# Altium PCB PCB_EN1093.PcbDoc
Units mm, origin at the board's own origin, x right, y up, seen from the top; angles counter-clockwise.
Board outline 80.26 x 60.25 mm, 2 copper layers (Top Layer, Bottom Layer); 26 components, 25 nets, 112 pads, 2 vias.
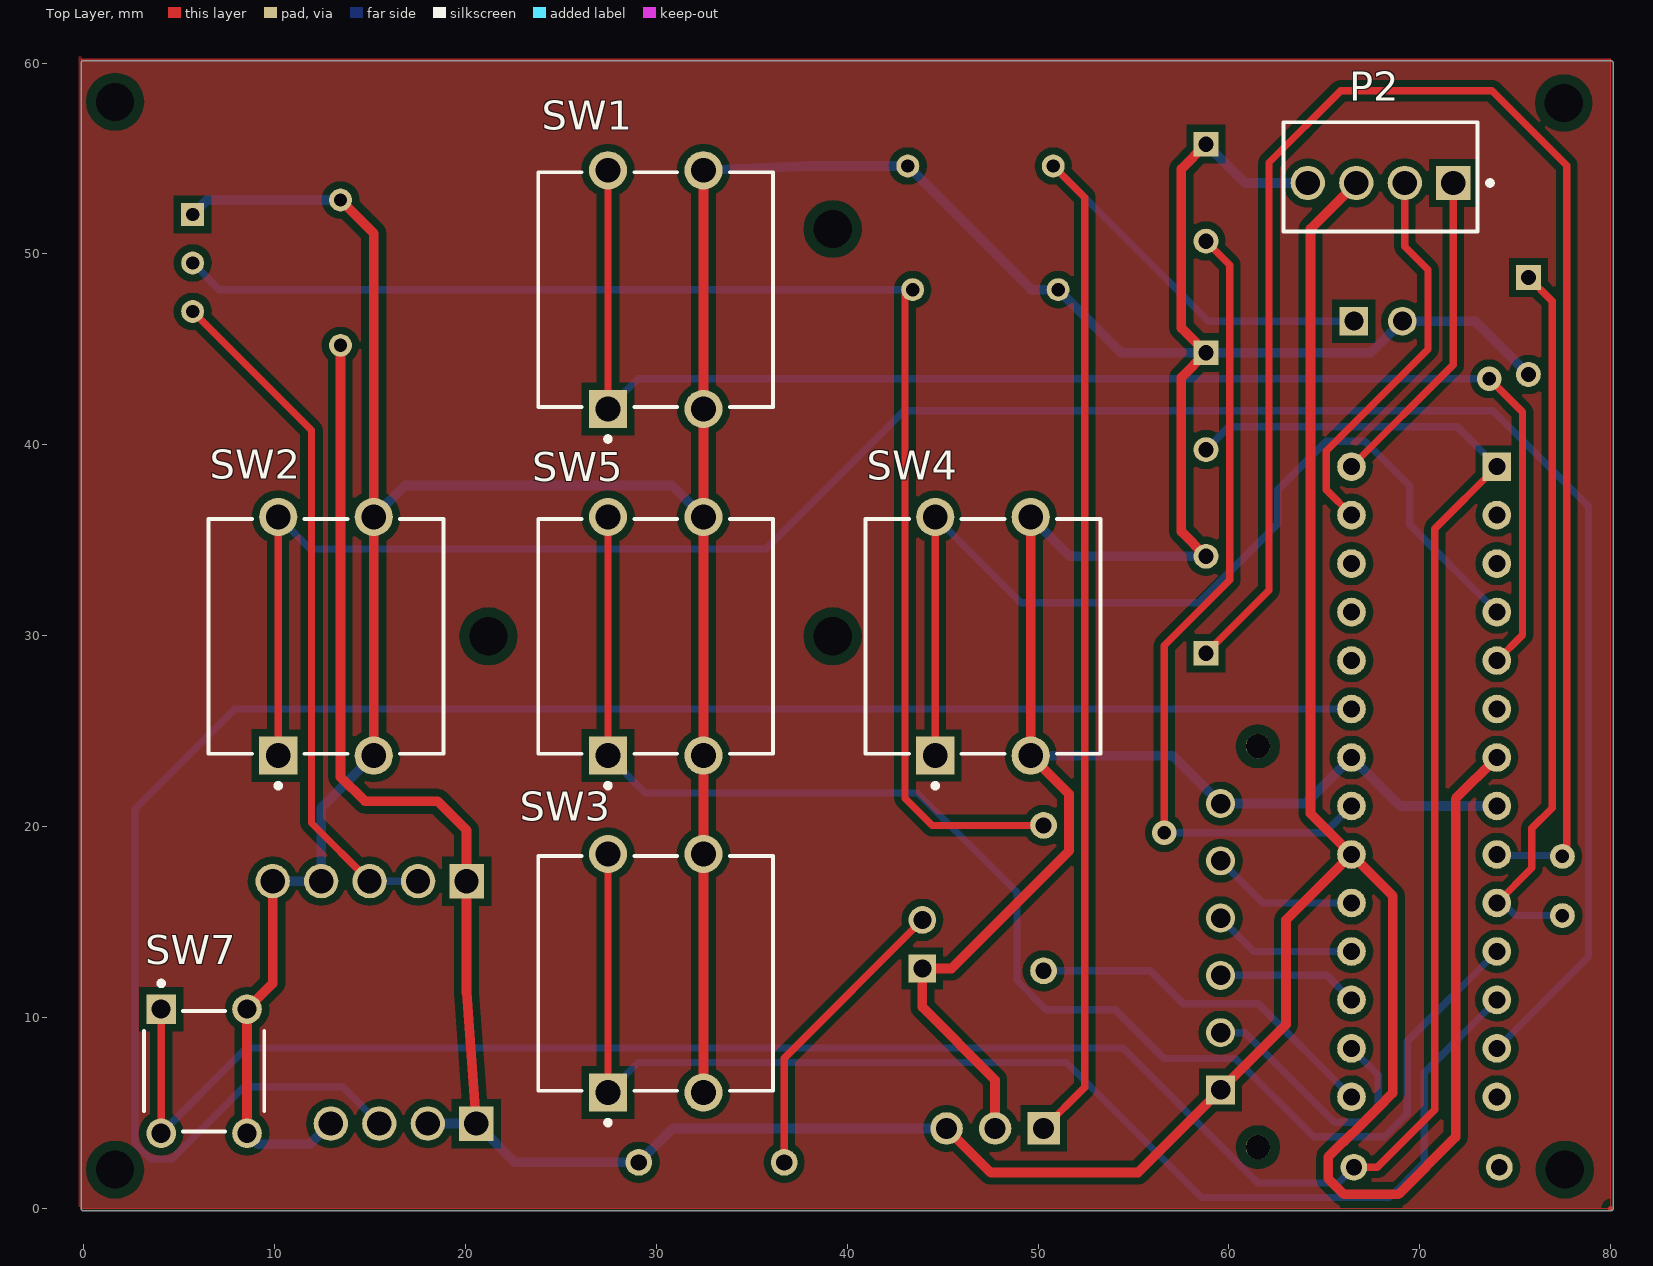
[diagram p0: Top Layer view]
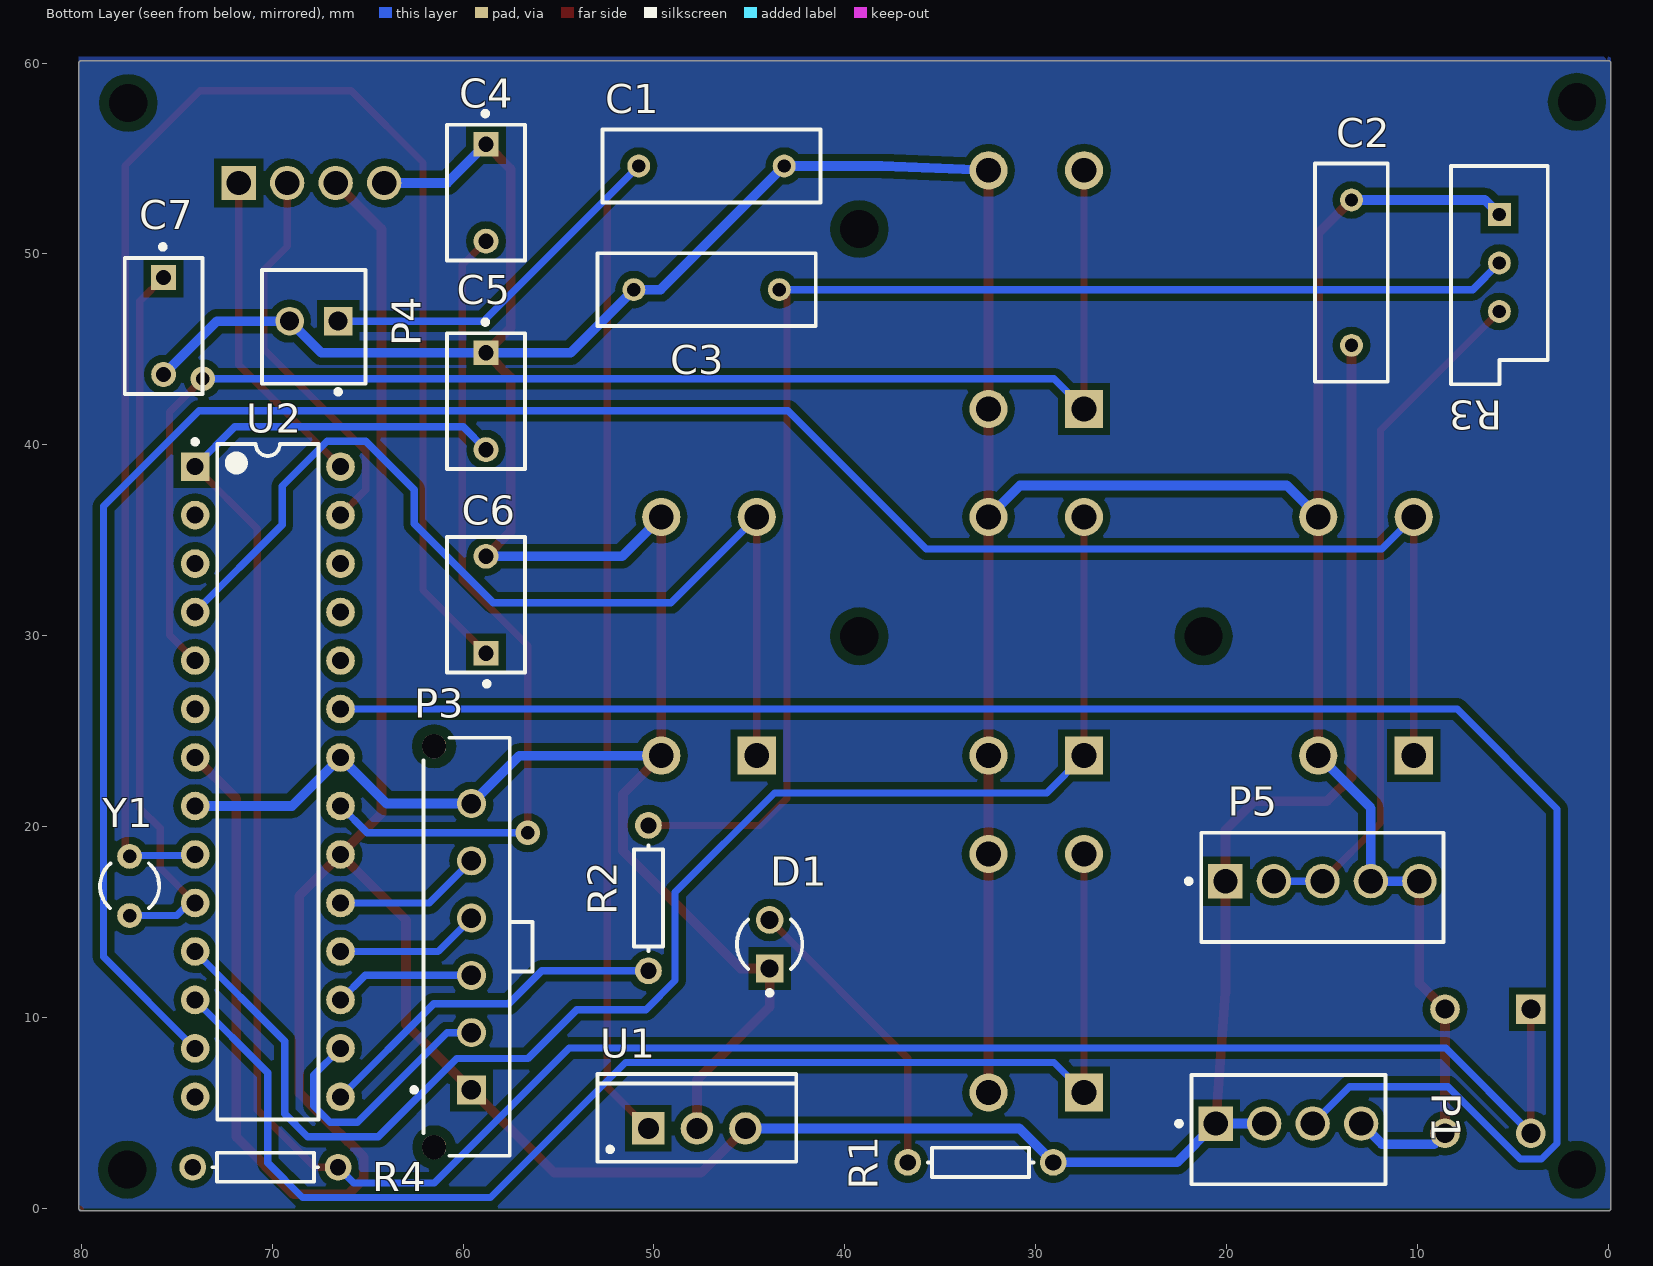
[diagram p1: Bottom Layer view, seen from below]
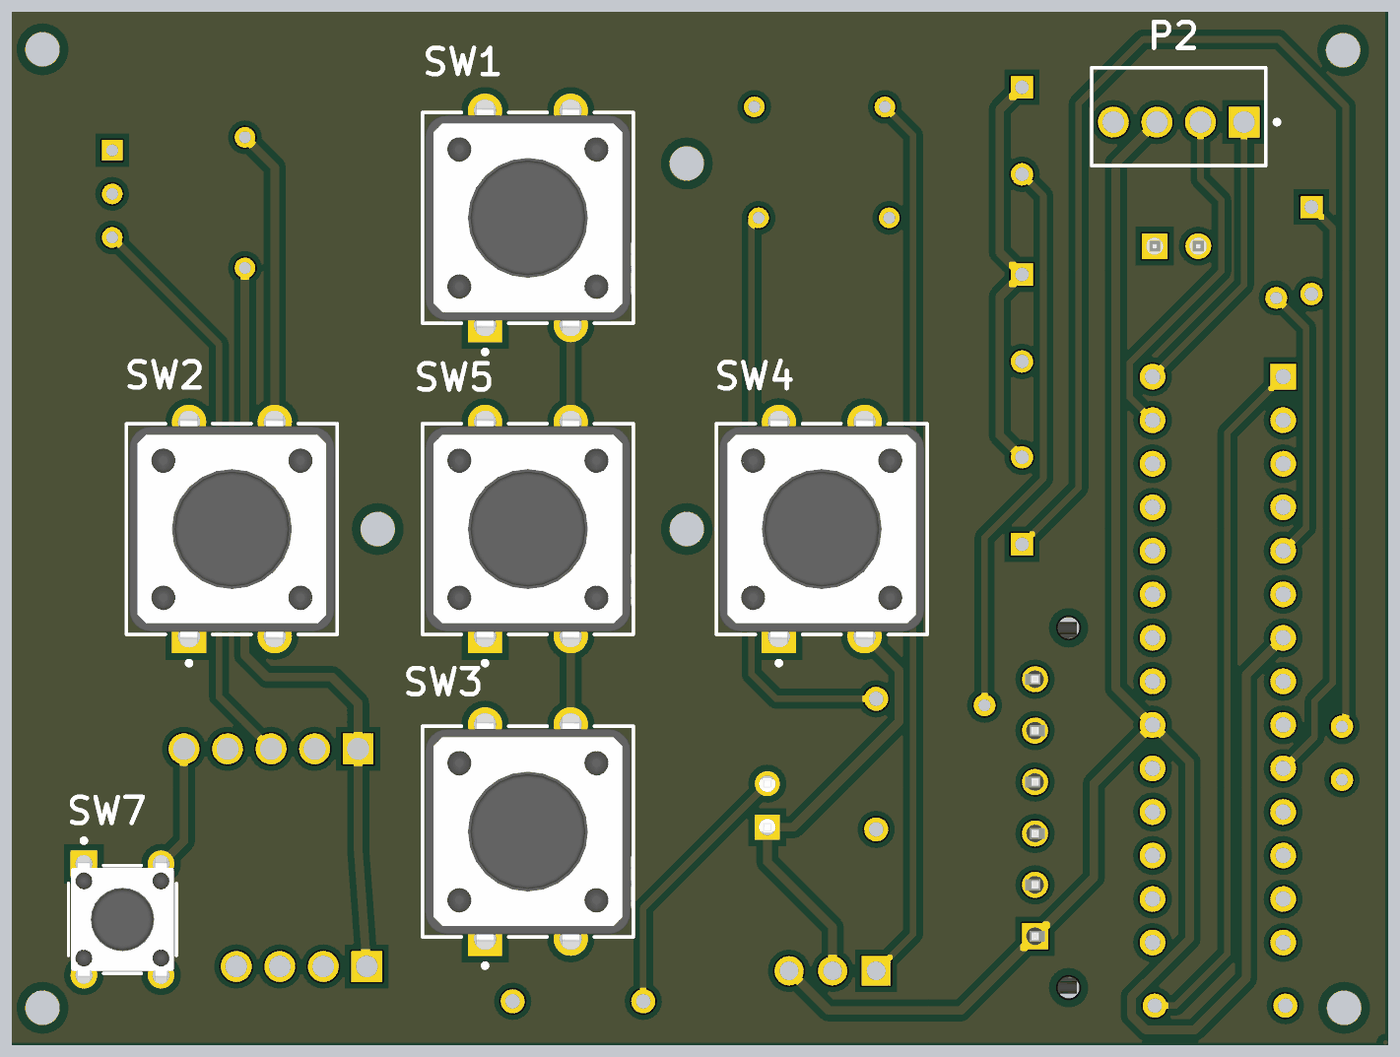
[diagram p2: 3D render of the assembled board from above, using the file's embedded part models]

## Layer stack, top to bottom
Top Solder: solder mask 0.0102, Solder Resist, Dk 3.5
Top Layer: signal copper 0.0356
Dielectric 1: dielectric 0.32, FR-4, Dk 4.8
Bottom Layer: signal copper 0.0356
Bottom Solder: solder mask 0.0102, Solder Resist, Dk 3.5

## Board outline
0,-0.127 cw(c0,0) -0.127,0 -0.127,60 cw(c0,60) 0,60.127 80,60.127 cw(c80,60) 80.127,60 80.127,0.059 cw(c80.01,0.01) 80.137,0.01 cw(c80.01,0.01) 80.1,-0.08 80.09,-0.09 cw(c80,-0.001) 80,-0.127

## Design rules (kind name [scope] priority, off if disabled: settings)
Clearance [All] p1: gap=0.381 ignorepadtopadclearanceinfootprint=TRUE except(0.508: Arc-Hole Track-Hole SMDPad-Hole THPad-Hole Via-Hole Fill-Hole Poly-Hole Region-Hole Text-Hole)
ComponentClearance [All] p1: gap=0.254 collisioncheckmode=3 verticalgap=0.508 showdistances=FALSE
PolygonConnect [All] p1: connectstyle=Relief reliefconductorwidth=0.254 reliefentries=4 polygonreliefangle="90 Angle" airgapwidth=0.254
RoutingVias [All] p1: holewidth=0.711 width=1.27 viastyle="Through Hole" minholewidth=0.711 minwidth=1.27 maxholewidth=0.711 maxwidth=1.27
SilkToSolderMaskClearance [IsPad] p1 off: minsilkscreentomaskgap=0.254 clearancetoexposedcopper=TRUE
SolderMaskExpansion [All] p1: expansion=0.102 istentingtop=FALSE
Width Width_1 [InNet('+5') or InNet('GND')] p1: maxlimit=0.635 minlimit=0.381 preferedwidth=0.508
Width [All] p2: maxlimit=0.508 minlimit=0.254 preferedwidth=0.381
28 further rules are at their usual default settings.

## Components (designator, comment, footprint, x,y, rotation, side; value= is the part's Value field where it differs from the comment)
C1 "330uF" RAD-0.3 46.99,54.61 r0 bottom
C2 "330uF" RAD-0.3 13.462,49.022 r270 bottom
C3 "330uF" RAD-0.3 47.244,48.133 r180 bottom
C4 "=value" KEMT-C330C105M5U5TA 58.801,53.213 r270 bottom
C5 "C330C105M5U5TA" KEMT-C330C105M5U5TA 58.801,42.291 r270 bottom
C6 "C330C105M5U5TA" KEMT-C330C105M5U5TA 58.801,31.623 r90 bottom
C7 "C330C105M5U5TA" KEMT-C330C105M5U5TA 75.692,46.228 r270 bottom
D1 "HLMP-1719" FP-HLMP-1719-MFG 43.942,13.843 r90 bottom
P1 "640456-4" TECO-640456-4 16.764,4.445 r0 bottom
P2 "640456-4" TECO-640456-4 67.945,53.721 r0 top
P3 "66200611122" 66200611122 59.818,13.709 r270 bottom
P4 "61900211121" 61900211121 67.818,46.182 r180 bottom
P5 "640456-5" TECO-640456-5 14.986,17.145 r0 bottom
R1 "330" AXIAL-0.3 32.893,2.413 r0 bottom
R2 "5K" AXIAL-0.3 50.292,16.256 r270 bottom
R3 "1K" VR5 5.715,49.53 r270 bottom
R4 "10K" AXIAL-0.3 70.358,2.159 r180 bottom
SW1 "FSM100" FP-FSM100-MFG 29.972,48.133 r90 top
SW2 "FSM100" FP-FSM100-MFG 12.7,29.972 r90 top
SW3 "FSM100" FP-FSM100-MFG 29.972,12.319 r90 top
SW4 "FSM100" FP-FSM100-MFG 47.117,29.972 r90 top
SW5 "FSM100" FP-FSM100-MFG 29.972,29.972 r90 top
SW7 "EVQ-PAG07K" FP-EVQ-PAG07K-MFG 6.314,7.187 r0 top
U1 "L7805CV" TO220 47.752,4.191 r180 bottom
U2 "ATmega328P-PU" 28P3 70.231,22.352 r180 bottom
Y1 "XTAL" R38 77.47,16.891 r0 bottom

## Footprints (in the part's own frame and the unit in brackets; to place one, negate y for a bottom-side part, rotate by r counter-clockwise, add the part's x,y. Pads: shape width x height; smd on the part's side, far side on the other; paste and mask are expansions set on the pad)
28P3 [mm] "28-Pin Plastic Dual In-Line Package (PDIP)"
  rect 1.5x1.5 hole 0.9: 1(-3.81,16.51)
  round 1.5 hole 0.9: 2(-3.81,13.97) 3(-3.81,11.43) 4(-3.81,8.89) 5(-3.81,6.35) 6(-3.81,3.81) 7(-3.81,1.27) 8(-3.81,-1.27) 9(-3.81,-3.81) 10(-3.81,-6.35) 11(-3.81,-8.89) 12(-3.81,-11.43) 13(-3.81,-13.97) 14(-3.81,-16.51) 15(3.81,-16.51) 16(3.81,-13.97) 17(3.81,-11.43) 18(3.81,-8.89) 19(3.81,-6.35) 20(3.81,-3.81) 21(3.81,-1.27) 22(3.81,1.27) 23(3.81,3.81) 24(3.81,6.35) 25(3.81,8.89) 26(3.81,11.43) 27(3.81,13.97) 28(3.81,16.51)
  silkscreen extent -3.94,-17.7 2.65,17.93, body extent -3.6,-17.65 3.6,17.65, height 4.58
61900211121 [mm] "2.54mm Male Locking Header, 2p"
  rect 1.5x1.5 hole 1: 1(1.27,0.3)
  round 1.5 hole 1: 2(-1.27,0.3)
  silkscreen extent -2.71,-3.52 2.71,2.98, body extent -2.54,-2.9 2.54,2.9, height 11.53
66200611122 [mm] "3.00mm Male Single Row Vertical Header, 6p"
  rect 1.52x1.52 hole 1.02: 1(7.5,0.255)
  round 1.52 hole 1.02: 2(4.5,0.255) 3(1.5,0.255) 4(-1.5,0.255) 5(-4.5,0.255) 6(-7.5,0.255)
  round 1.27 hole 1.27 unplated: MH1(-10.5,-1.705) MH2(10.5,-1.705)
  silkscreen extent -10.95,-2.88 10.95,3.46, body extent -10.82,-2.19 10.83,3.38, height 9.93
AXIAL-0.3 [mm] "Axial Device, Thru-Hole; 2 Leads; 0.3 in Pin Spacing"
  round 1.4 hole 0.85: 1(-3.81,0) 2(3.81,0)
  silkscreen extent -2.77,-0.76 2.77,0.76
FP-EVQ-PAG07K-MFG [mm]
  rect 1.55x1.55 hole 1 paste-1000 mask+0: A(-2.25,3.25)
  round 1.55 hole 1 paste-1000 mask+0: A'(-2.25,-3.25) B(2.25,3.25) B'(2.25,-3.25)
  silkscreen extent -3.15,-3.15 3.15,4.72, body extent -3.25,-4.13 3.25,4.13, height 0.25
FP-FSM100-MFG [mm]
  rect 2x2 hole 1.3 paste-1000 mask+0: 1(-6.25,2.5)
  round 2 hole 1.3 paste-1000 mask+0: 2(6.25,2.5) 3(-6.25,-2.5) 4(6.25,-2.5)
  silkscreen extent -7.95,-6.15 6.15,6.15, body extent -7.35,-6.25 7.35,6.25, height 0.25
FP-HLMP-1719-MFG [mm]
  rect 1.45x1.45 hole 0.95 paste-1000 mask+0: 1(-1.27,0)
  round 1.45 hole 0.95 paste-1000 mask+0: 2(1.27,0)
  silkscreen extent -2.67,-1.71 1.3,1.71, body extent -1.59,-1.59 1.6,1.59, height 8.47
KEMT-C330C105M5U5TA [mm] "THD, 2-Leads, Body 7.11x4.07mm"
  rect 1.3x1.3 hole 0.8: 1(-2.54,0)
  round 1.3 hole 0.8: 2(2.54,0)
  silkscreen extent -4.27,-2.03 3.55,2.03, body extent -3.55,-2.03 3.55,2.03, height 9.14
R38 [mm] "Crystal, Thru-Hole; 2 Leads; Body 3.1 x 8.2 mm (Dia.xH)"
  round 1.3 hole 0.7: 1(0,1.55) 2(0,-1.55)
  silkscreen extent -1.55,-1.19 1.55,1.17
RAD-0.3 [mm] "Radial Cap, Thru-Hole; 2 Leads; 0.3 in Pin Spacing"
  round 1.2 hole 0.7: 1(-3.81,0) 2(3.81,0)
  silkscreen extent -5.71,-1.91 5.71,1.91
TECO-640456-4 [mm] "Through Hole, 4-Leads, Body 10.16x5.72mm, Pitch 2.54mm"
  rect 1.8x1.8 hole 1.27 paste+0: 1(3.81,0)
  round 1.8 hole 1.27 paste+0: 2(1.27,0) 3(-1.27,0) 4(-3.81,0)
  silkscreen extent -5.08,-2.54 5.86,3.18, body extent -5.08,-2.54 5.08,3.18, height 10.03
TECO-640456-5 [mm] "Through Hole, 5-Leads, Body 12.7x5.72mm, Pitch 2.54mm"
  rect 1.8x1.8 hole 1.27 paste+0: 1(5.08,0)
  round 1.8 hole 1.27 paste+0: 2(2.54,0) 3(0,0) 4(-2.54,0) 5(-5.08,0)
  silkscreen extent -6.35,-2.54 7.13,3.18, body extent -6.35,-2.67 6.35,3.17, height 10.29
TO220 [mm] "TO, Thru-Hole, Vertical, Heatsink Mounted; 3 In-Line Leads; Pitch 2.54 mm"
  rect 1.7x1.7 hole 1.1: 1(-2.54,0)
  round 1.7 hole 1.1: 2(0,0) 3(2.54,0)
  silkscreen extent -5.2,-1.75 5.2,2.85, body extent -5.25,-1.8 5.25,2.9, height 19.7
VR5 [mm] "Thru-Hole; 3 Leads"
  rect 1.2x1.2 hole 0.7: 1(-2.54,0)
  round 1.2 hole 0.7: 2(0,0) 3(2.54,0)
  silkscreen extent -5.08,-2.54 6.35,2.54

## Part data
C1 C2 C3: library part Cap, "Capacitor", LatestRevisionDate=17-Jul-2002, LatestRevisionNote="Re-released for DXP Platform.", PackageDescription="Radial Cap, Thru-Hole; 2 Leads; 0.3 in Pin Spacing", PackageReference=RAD-0.3, Published=8-Jun-2000, Publisher="Altium Limited"
C4: library part CMP-2000-06056-1, "Ceramic Capacitor, 1 uF, +/- 20%, 50 V, -10 to 85 degC, 2-Pin THD, RoHS, Bulk", Capacitance=100uF, Manufacturer=Kemet, Operating Temperature=10°C~85°C, Package / Case=Radial, Package Description="2-Pin Through Hole Device, Body 7.11 x 4.07 mm", Package Reference=C330C105M5U5TA, Ratings=-, Standard Package=250, Temperature Coefficient=Z5U, Tolerance=±20%, Voltage - Rated=50V, Applications=GeneralPurpose, Catalog Drawings=C330(std), Category=Capacitors, Datasheet URL=http://www.kemet.com/Lists/ProductCatalog/Attachments/599/KEM_C1051_GOLDMAX_Z5U.pdf, Datasheet Version=12/2015, Family=CeramicCapacitors, Features=-, Height - Seated (Max)="0.360\"(9.14mm)", Lead Spacing="0.200\"(5.08mm)", Lead Style=Straight, Manufacturer URL=http://www.kemet.com/, Mounting Technology=ThroughHole, Mounting Type=ThroughHole, Online Catalog=GoldenMax™Series, Other Names=399-4390, Packaging=Bulk, PCN Design/Specification=C3yySeriesGoldenMaxLeadConfiguration02/Feb/2015, Product Training Modules=CapacitorBasics-TypicalUsesforCapacitors, Series=GoldenMax™, Size / Dimension="0.300\"Lx0.150\"W(7.62mmx3.81mm)", Thickness (Max)=-
C5: library part CMP-2000-06056-1, "Ceramic Capacitor, 1 uF, +/- 20%, 50 V, -10 to 85 degC, 2-Pin THD, RoHS, Bulk", Capacitance=100uF, Manufacturer=Kemet, Operating Temperature=10°C~85°C, Package / Case=Radial, Package Description="2-Pin Through Hole Device, Body 7.11 x 4.07 mm", Ratings=-, Standard Package=250, Temperature Coefficient=Z5U, Tolerance=±20%, Voltage - Rated=50V, Applications=GeneralPurpose, Catalog Drawings=C330(std), Category=Capacitors, Datasheet URL=http://www.kemet.com/Lists/ProductCatalog/Attachments/599/KEM_C1051_GOLDMAX_Z5U.pdf, Datasheet Version=12/2015, Family=CeramicCapacitors, Features=-, Height - Seated (Max)="0.360\"(9.14mm)", Lead Spacing="0.200\"(5.08mm)", Lead Style=Straight, Manufacturer URL=http://www.kemet.com/, Mounting Technology=ThroughHole, Mounting Type=ThroughHole, Online Catalog=GoldenMax™Series, Other Names=399-4390, Package Reference=C330C105M5U5TA, Packaging=Bulk, PCN Design/Specification=C3yySeriesGoldenMaxLeadConfiguration02/Feb/2015, Product Training Modules=CapacitorBasics-TypicalUsesforCapacitors, Series=GoldenMax™, Size / Dimension="0.300\"Lx0.150\"W(7.62mmx3.81mm)", Thickness (Max)=-
C6 C7: library part CMP-2000-06056-1, "Ceramic Capacitor, 1 uF, +/- 20%, 50 V, -10 to 85 degC, 2-Pin THD, RoHS, Bulk", Capacitance=22pF, Manufacturer=Kemet, Operating Temperature=10°C~85°C, Package / Case=Radial, Package Description="2-Pin Through Hole Device, Body 7.11 x 4.07 mm", Ratings=-, Standard Package=250, Temperature Coefficient=Z5U, Tolerance=±20%, Voltage - Rated=50V, Applications=GeneralPurpose, Catalog Drawings=C330(std), Category=Capacitors, Datasheet URL=http://www.kemet.com/Lists/ProductCatalog/Attachments/599/KEM_C1051_GOLDMAX_Z5U.pdf, Datasheet Version=12/2015, Family=CeramicCapacitors, Features=-, Height - Seated (Max)="0.360\"(9.14mm)", Lead Spacing="0.200\"(5.08mm)", Lead Style=Straight, Manufacturer URL=http://www.kemet.com/, Mounting Technology=ThroughHole, Mounting Type=ThroughHole, Online Catalog=GoldenMax™Series, Other Names=399-4390, Package Reference=C330C105M5U5TA, Packaging=Bulk, PCN Design/Specification=C3yySeriesGoldenMaxLeadConfiguration02/Feb/2015, Product Training Modules=CapacitorBasics-TypicalUsesforCapacitors, Series=GoldenMax™, Size / Dimension="0.300\"Lx0.150\"W(7.62mmx3.81mm)", Thickness (Max)=-
D1: library part CMP-2000-06410-2, "LED YELLOW DIFFUSED T-1 T/H", Colour=Yellow, Forward Current=2mA, Forward Voltage=1.8V, Manufacturer=Broadcom, Package=0, Power Dissipation=17.5mW, Reverse Voltage=5V, Temperature="-40°C to +100°C", Temperature Range High=+100°C, Temperature Range Low=-40°C, Automotive=No, Category=Diode, ComponentLink2Description=Datasheet, ComponentLink2URL=https://docs.broadcom.com/docs/AV02-1557EN, Device Class L1=Optoelectronics, Device Class L2=LEDs, Device Class L3=unset, Digikey Description="LED YELLOW DIFFUSED T-1 T/H", Lead Free=Yes, Led Orientation=Straight, Luminous Intensity=2.1mcd, Manufacturer Part Number=HLMP-1719, Mouser Description="Standard LEDs - Through Hole Yellow Diffused 585nm 2.1mcd", Octopart=https://octopart.com/hlmp-1719-broadcom-71130405, RoHS=TRUE, Viewing Angle=50°, Wavelength=585nm
P1 P2: library part CMP-2000-05419-1, "Male Header, Pitch 2.54 mm, 1 x 4 Position, Height 10.03 mm, Tail Length 3.56 mm, RoHS, Bulk", Color=White, Current, Rating="5 /  / A", Flammability Rating=UL94V-0, Manufacturer="TE Connectivity", Temperature, Operating="-55to+105 /  / degC", Voltage, Rating="250 /  / V", Agency Approvals=CSA,UL, Angle=Straight, Brand/Series=MTA-100Series, Color, Housing=White, Connector Type=MTA-100, Contact Centerline Spacing="0.100 /  / in.", Contact Mating Area Plating=Tin, Contact Plating=Tin, Contact Shape=Square, Contact Termination Area Plating=Tin, Datasheet URL=https://datasheet.ciiva.com/16286/eng-ds-82056-mta-0608-16286228.pdf, Datasheet Version=Dec-14, Length, Overall="0.4 /  / \"", Length, Pin="0.14 /  / \"", Length, Terminal Post="0.14 /  / in.", Manufacturer URL=http://www.te.com/, Material, Contact=CopperAlloy, Material, Housing=Polyester, Mount Angle=Vertical, Mounting Hole Size="0.04 /  / \"", Mounting Type=PCMount, Number of Contacts=4, Number of Positions=4, Number of Rows=1, Pin Spacing="0.1 /  / \"", Primary Type=InterconnectSystem, Size, Post="0.025 /  / in.", Special Features=Pinstrip, Standards=RoHSCompliant,ELVCompliant,UL94V-0, Termination=Solder, Type=PCBPlug
P3: library part CMP-1502-00444-1, "THT Male Header WR-MPC3, Vertical, Single Row, pitch 3 mm, 6 pins", Contact Resistance=10mOhm, Manufacturer="Wurth Elektronik", Operating Temperature=-40to105degC, Working Voltage=250VAC, Datasheet URL=https://katalog.we-online.de/em/datasheet/6620xx11122.pdf, Gender=Male, Manufacturer URL=http://www.we-online.de, Mounting Technology=THT, Orientation=Vertical, Package Reference=66200611122, Packaging=Tube, Part Number=66200611122, Pin Number=6, Pitch=3mm, Publisher=WurthElektronik
P4: library part CMP-1502-00584-1, "Male Locking Header WR-WTB, THT, Vertical, pitch 2.54 mm, 1 x 2 position", Contact Resistance=20mOhm, Manufacturer="Wurth Elektronik", Operating Temperature=-40to105degC, Working Voltage=250VAC, Datasheet URL=https://katalog.we-online.de/em/datasheet/6190xx11121.pdf, Gender=Male, Manufacturer URL=http://www.we-online.de, Mounting Technology=THT, Orientation=Vertical, Package Reference=61900211121, Packaging=Bag, Part Number=61900211121, Pitch=2.54mm, Position=1x2, Publisher=WurthElektronik
P5: library part CMP-1684-00014-1, "Male Header, Pitch 2.54 mm, 1 x 5 Position, Height 10.03 mm, Tail Length 3.56 mm,  / -55 to 105 degC, RoHS, Bulk", Color=White, Current, Rating="5 /  / A", Flammability Rating=UL94V-0, Manufacturer="TE Connectivity", Package Description="Male Header, Pitch 2.54 mm, 1 x 5 Position, Height 10.03 mm, Tail Length 3.56 mm", Package Reference=THD, Temperature, Operating="-55to+105 /  / °C", Voltage, Rating="250 /  / V", Agency Approvals=CSA,UL, Angle=Straight, Brand/Series=MTA-100Series, Color, Housing=White, Connector Type=MTA-100, Contact Centerline Spacing="0.100 /  / in.", Contact Mating Area Plating=Tin, Contact Plating=Tin, Contact Shape=Square, Contact Termination Area Plating=Tin, Datasheet URL=http://sigma.octopart.com/77881742/technical_drawing/TE-Connectivity-640456-5.pdf, Datasheet Version="Rev. W3", Length, Overall="0.5 /  / \"", Length, Pin="0.14 /  / \"", Length, Terminal Post="0.14 /  / in.", Manufacturer URL=http://www.te.com, Material, Contact=CopperAlloy, Material, Housing=Polyester, Mount Angle=Vertical, Mounting Hole Size="0.04 /  / \"", Mounting Type=PCMount, Number of Contacts=5, Number of Positions=5, Number of Rows=1, Pin Spacing="0.1 /  / \"", Primary Type=InterconnectSystem, Size, Post="0.025 /  / in.", Special Features=Pinstrip, Standards=RoHSCompliant,ELVCompliant,UL94V-0, Termination=Solder, Type=PCBPlug
R1 R2 R4: library part Res1, "Resistor", LatestRevisionDate=17-Jul-2002, LatestRevisionNote="Re-released for DXP Platform.", PackageDescription="Axial Device, Thru-Hole; 2 Leads; 0.3 in Pin Spacing", PackageReference=AXIAL-0.3, Published=8-Jun-2000, Publisher="Altium Limited"
R3: library part RPot, "Potentiometer", LatestRevisionDate=17-Jul-2002, LatestRevisionNote="Re-released for DXP Platform.", PackageDescription="Variable Resistor, Thru-Hole; 3 Leads", PackageReference=VR5, Published=8-Jun-2000, Publisher="Altium Limited", Set Position=0.5, Sim Note="Enter the Resistance value and the set point into parameter fields."
SW1 SW2 SW3 SW4 SW5: library part CMP-03402-000014-1, "SWITCH TACTILE SPST-NO 0.05A 24V", Actuator Color=Black, Contact Current Rating=50mA, Contact Resistance=100mR, Max Operating Temperature=85°C, Max Voltage Rating (DC)=12V, Min Operating Temperature=-35°C, Operating Force=1.57N, Package Quantity=400, Voltage Rating (DC)=24V, Actuator Length=6.35mm, Actuator Material=Polyester, Actuator Type=Standard, Contact Material="Copper Alloy", Contact Plating=Silver, Contact Type="1 maker", Current Rating=50mA, Depth=12.5mm, Electrical Life=100000Cycles, ELV=Compliant, Illumination Type=Non-Illuminated, Lead Free="Lead Free", Length=12mm, Max Current Rating=50mA, Mechanical Life=100000Cycles, Mount="Through Hole", Orientation=Straight, Packaging="Loose Piece", RoHS Compliant=Yes, Series="FSM100 ~ 104", Switch Function=Off-Mom, Switch Travel=0.3mm, Termination="PC Pins", Throw Configuration=SPST, Type=Switch
SW7: library part CMP-05618-000034-1, "SWITCH TACTILE SPST-NO 0.02A 15V", Actuator Color=Black, Contact Current Rating=20mA, Contact Resistance=50mR, Max Operating Temperature=70°C, Max Voltage Rating (DC)=15V, Min Operating Temperature=-20°C, Operating Force=2.6N, Package Quantity=500, Actuator Length=3.1mm, Actuator Type=Standard, Current Rating=20mA, Depth=7.8mm, Electrical Life=50000Cycles, Illumination Type=Non-Illuminated, Lead Free="Lead Free", Length=6mm, Max Current Rating=20mA, Mechanical Life=50000Cycles, Mount="Through Hole", Orientation=Straight, Packaging=Bulk, Radiation Hardening=No, RoHS Compliant=Yes, Series=EVQPA, Size=6mm, Switch Function=Off-Mom, Switch Travel=0.25mm, Termination="PC Pin", Throw Configuration=SPST, Voltage Rating (DC)=15V
U1: library part CMP-0244-00483-1, "Positive Voltage Regulator, 5V, 3-Pin TO-220", ComponentLink1Description="Manufacturer URL", ComponentLink1URL=http://www.st.com, ComponentLink2Description=Datasheet, ComponentLink2URL=http://www.st.com/internet/com/TECHNICAL_RESOURCES/TECHNICAL_LITERATURE/DATASHEET/CD00000444.pdf, ComponentLink3Description="Package Specification", ComponentLink3URL=http://www.st.com/internet/com/TECHNICAL_RESOURCES/TECHNICAL_LITERATURE/PACKAGE_INFORMATION/CD00004649.pdf, DatasheetVersion=16/11/2011, PackageDescription="TO, Thru-Hole, Vertical, Heatsink Mounted; 3 In-Line Leads; Pitch 2.54 mm", PackageReference=TO220, PackageVersion=ver3.0
U2: library part CMP-0095-00013-2, "8-bit AVR Microcontroller, 32KB Flash, 1KB EEPROM, 2KB SRAM, 28-pin PDIP, Industrial Grade (-40°C to 85°C)", ComponentLink1Description="Manufacturer URL", ComponentLink1URL=http://www.atmel.com/, ComponentLink2Description="ATmega48A/48PA/88A/88PA/168A/168PA/328/328P Datasheet", ComponentLink2URL=http://www.atmel.com/dyn/resources/prod_documents/8271.pdf, ComponentLink3Description="ATmega48A/48PA/88A/88PA/168A/168PA/328/328P Summary", ComponentLink3URL=http://www.atmel.com/dyn/resources/prod_documents/8271S.pdf, DatasheetVersion="revD, May-2011", PackageDescription="28-lead (0.300\"/7.62mm Wide) Plastic Dual Inline Package (PDIP)", PackageReference=28P3, PackageVersion="revB, Sep-2001", RevisionNote="DatasheetVersion updated. URLs added."
Y1: "Crystal Oscillator", LatestRevisionDate=17-Jul-2002, LatestRevisionNote="Re-released for DXP Platform.", PackageDescription="Crystal, Thru-Hole; 2 Leads; Body 3.1 x 8.2 mm (Dia.xH)", PackageReference=R38, Published=8-Jun-2000, Publisher="Altium Limited"

## Free pads (board coordinates)
  oval 1.55x0.6 hole 2: 65(1.651,2.032) 65(77.597,2.032) 66(21.209,29.972) 66(39.243,29.972) 66(39.243,51.308) 66(77.541,57.912) 68(1.651,57.968)

## Via types
v1: diameter 1.27, hole 0.711, Top Layer to Bottom Layer, 2 vias

## Nets (pads, with @x,y where several pads share a name; then routed paths per layer and width w, separated by ;. In a path a pad name is that pad's centre, name@x,y a point inside that pad or via, vN(x,y) a via of type N, cw(c..) or ccw(c..) an arc to the next point about the centre after c; other vN are vias at no path point)
+5: C2.2 P1.1 P1.2 P2.3 P3.1 P5.1 R1.1 U1.3 U2.7 U2.20 | length 192.2
  Top Layer w0.508: C2.2 13.462,22.606 14.732,21.336 18.542,21.336 20.066,19.812 P5.1 20.066,11.303 P1.1 ; U1.3 47.523,1.88 55.234,1.88 P3.1 62.992,9.638 62.992,15.113 U2.20 ; P2.3 64.274,51.32 64.274,20.689 U2.20 ; U2.7 71.882,21.463 71.882,3.746 68.876,0.741 66.04,0.741 65.202,1.579 65.202,2.666 65.213,2.677 65.213,2.712 65.995,3.494 66.03,3.494 66.993,4.457 66.995,4.457 67.806,5.268 67.806,5.27 68.58,6.044 68.58,16.383 U2.20
  Bottom Layer w0.508: P1.2 P1.1 22.606,2.413 R1.1 30.861,4.191 U1.3
DLT: SW2.1 SW2.2 U2.13 | length 117.3
  Top Layer w0.381: SW2.1 SW2.2
  Bottom Layer w0.381: SW2.2 11.878,34.544 35.738,34.544 42.977,41.783 73.838,41.783 78.842,36.779 78.842,13.183 U2.13
GND: C1.1 C2.1 C3.1 C4.1 C5.1 C6.2 C7.2 D1.1 P1.4 P2.4 P3.6 P4.2 P5.4 P5.5 R3.1 SW1.3 SW1.4 SW2.3 SW2.4 SW3.3 SW3.4 SW4.3 SW4.4 SW5.3 SW5.4 SW7.B SW7.B' U1.2 U2.8 U2.22 | length 289
  Top Layer w0.508: SW7.B' SW7.B 9.906,11.779 P5.5 ; C2.1 15.2,51.094 SW2.4 SW2.3 ; SW3.3 SW3.4 SW5.3 SW5.4 SW1.3 SW1.4 ; U1.2 47.752,6.731 43.942,10.541 D1.1 45.469,12.573 51.627,18.731 51.627,21.712 SW4.3 SW4.4 ; C6.2 57.506,35.458 57.506,43.536 C5.1 57.506,46.126 57.506,54.458 C4.1
  Bottom Layer w0.508: R3.1 6.477,52.832 C2.1 ; SW7.B' 9.136,3.365 11.874,3.365 P1.4 ; P5.5 P5.4 12.446,20.968 SW2.3 ; SW2.4 16.849,37.871 30.823,37.871 SW5.4 ; SW1.4 38.073,54.61 C1.1 49.657,48.133 C3.1 54.356,44.831 C5.1 67.437,44.831 P4.2 72.898,46.482 C7.2 ; SW4.3 57.05,23.722 P3.6 64.008,21.209 U2.22 68.961,21.082 U2.8 ; SW4.4 51.676,34.163 C6.2 ; C4.1 60.833,53.721 P2.4
MIC: P1.3 U2.23 | length 98.9
  Bottom Layer w0.381: P1.3 13.564,6.375 8.407,6.375 4.622,2.59 3.506,2.59 2.692,3.404 2.692,20.93 7.925,26.162 U2.23
MISO: P3.4 U2.18 | length 7.6
  Bottom Layer w0.381: P3.4 61.31,13.462 U2.18
MOSI: P3.3 U2.17 | length 7.4
  Bottom Layer w0.381: P3.3 65.134,12.209 U2.17
NetC3_2: C3.2 R2.1 R3.2 | length 73.2
  Top Layer w0.381: C3.2 43.028,48.133 43.028,21.488 44.45,20.066 R2.1
  Bottom Layer w0.381: R3.2 7.112,48.133 C3.2
NetC4_2: C4.2 U2.21 | length 43.3
  Top Layer w0.381: v1(56.617,19.685) 56.617,29.489 60.046,32.918 60.046,49.428 C4.2
  Bottom Layer w0.381: v1(56.617,19.685) 65.024,19.685 U2.21
NetC5_2: C5.2 R4.2 SW7.A SW7.A' U2.1 | length 131.2
  Top Layer w0.381: SW7.A' SW7.A ; R4.2 67.775,2.159 70.79,5.174 70.79,35.611 U2.1
  Bottom Layer w0.381: SW7.A' 8.53,8.403 54.437,8.403 61.506,1.333 65.722,1.333 R4.2 ; C5.2 59.996,40.946 71.957,40.946 U2.1
NetC6_1: C6.1 U2.9 Y1.2 | length 85.9
  Top Layer w0.381: C6.1 62.103,32.385 62.103,54.788 65.862,58.547 73.787,58.547 77.699,54.635 77.699,18.695 Y1.2@77.597,18.695
  Bottom Layer w0.381: U2.9 74.091,18.492 Y1.2@77.327,18.492 ; Y1.2@77.172,18.337 Y1.2@77.327,18.492 ; Y1.2 77.42,18.492 Y1.2@77.327,18.492 ; Y1.2@77.597,18.542 77.378,18.542 Y1.2@77.327,18.492
NetC7_1: C7.1 U2.10 Y1.1 | length 38.2
  Top Layer w0.381: U2.10 75.87,17.831 75.87,19.914 76.937,20.98 76.937,47.523 C7.1
  Bottom Layer w0.381: U2.10 74.344,16.002 75.005,15.341 Y1.1
NetD1_2: D1.2 R1.2 | length 15.7
  Top Layer w0.381: R1.2 36.703,7.874 D1.2
NetP5_2: P5.2 P5.3 R3.3 | length 36.2
  Top Layer w0.381: R3.3 11.938,40.767 11.938,20.193 P5.3
  Bottom Layer w0.381: P5.3 P5.2
NXT: SW3.1 SW3.2 U2.12 | length 69.7
  Top Layer w0.381: SW3.1 SW3.2
  Bottom Layer w0.381: SW3.1 29.044,7.641 51.491,7.641 58.56,0.571 68.415,0.571 70.231,2.388 70.231,7.112 U2.12
PLY: SW5.1 SW5.2 U2.11 | length 76.3
  Top Layer w0.381: SW5.1 SW5.2
  Bottom Layer w0.381: SW5.1 29.426,21.768 43.688,21.768 48.895,16.561 48.895,11.938 50.419,10.414 54.051,10.414 56.617,7.849 60.35,7.849 64.441,3.758 68.147,3.758 69.342,4.953 69.342,8.763 U2.11
PRVS: SW1.1 SW1.2 U2.5 | length 75.4
  Top Layer w0.381: SW1.1 SW1.2 ; v1(73.635,43.459) 75.387,41.707 75.387,30.048 U2.5
  Bottom Layer w0.381: SW1.1 29.048,43.459 v1(73.635,43.459)
RCRD: SW4.1 SW4.2 U2.4 | length 53.2
  Top Layer w0.381: SW4.1 SW4.2
  Bottom Layer w0.381: SW4.2 49.114,31.725 58.42,31.725 62.56,35.865 62.56,37.644 65.1,40.184 67.131,40.184 69.469,37.846 69.469,35.814 U2.4
RX: U2.3
SCK: P3.5 U2.19 | length 7.8
  Bottom Layer w0.381: P3.5 61.77,16.002 U2.19
SCL: P2.1 U2.28 | length 17.1
  Top Layer w0.381: U2.28 71.755,44.196 P2.1
SDA: P2.2 U2.27 | length 20.7
  Top Layer w0.381: U2.27 65.099,37.644 65.099,39.674 70.434,45.009 70.434,49.174 69.215,50.394 P2.2
SPKR: R2.2 U2.15 | length 18.9
  Bottom Layer w0.381: R2.2 55.88,12.446 57.607,10.719 61.544,10.719 U2.15
SS: P3.2 U2.16 | length 14.1
  Bottom Layer w0.381: P3.2 60.844,9.209 65.533,4.52 66.877,4.52 66.968,4.52 67.818,5.37 67.818,6.985 U2.16
TX: U2.2
VCC: C1.2 P4.1 U1.1 | length 71.1
  Top Layer w0.381: U1.1 52.453,6.352 52.453,52.957 C1.2
  Bottom Layer w0.381: C1.2 58.928,46.482 P4.1
pads on no net: P3.MH1 P3.MH2 R4.1 U2.6 U2.14 U2.24 U2.25 U2.26
copper on no net: | length 0
  Top Layer w0.254: 80,0 80.01,0.01

## Polygon pours and split planes (outlines as drawn)
no net on Bottom Layer "NONET_L-01_P-001" (solid, pour order 0): 0,60.071 0.254,60.325 80.137,60.325 80.137,0.254 79.883,0 -0.127,0 -0.127,60.452 0,60.325 0.127,60.325
no net on Top Layer "NONET_L-01_P-001" (solid, pour order 2): -0.137,0.01 80.01,0.01 80.01,60.198 -0.127,60.198 -0.127,0
no net on Top Layer "NONET_L-01_P-001" (solid, pour order 1): -0.127,60.198 80.01,60.198 80.01,0.01 -0.117,0.01 -0.127,0 -0.254,0.127 -0.254,60.325 -0.127,60.325